# Altium PCB Key.PcbDoc
Units mil, origin at the board's own origin, x right, y up, seen from the top; angles counter-clockwise.
Board outline 6000 x 4000 mil, 2 copper layers (Top Layer, Bottom Layer); 8 components, 4 nets, 18 pads, 2 vias.
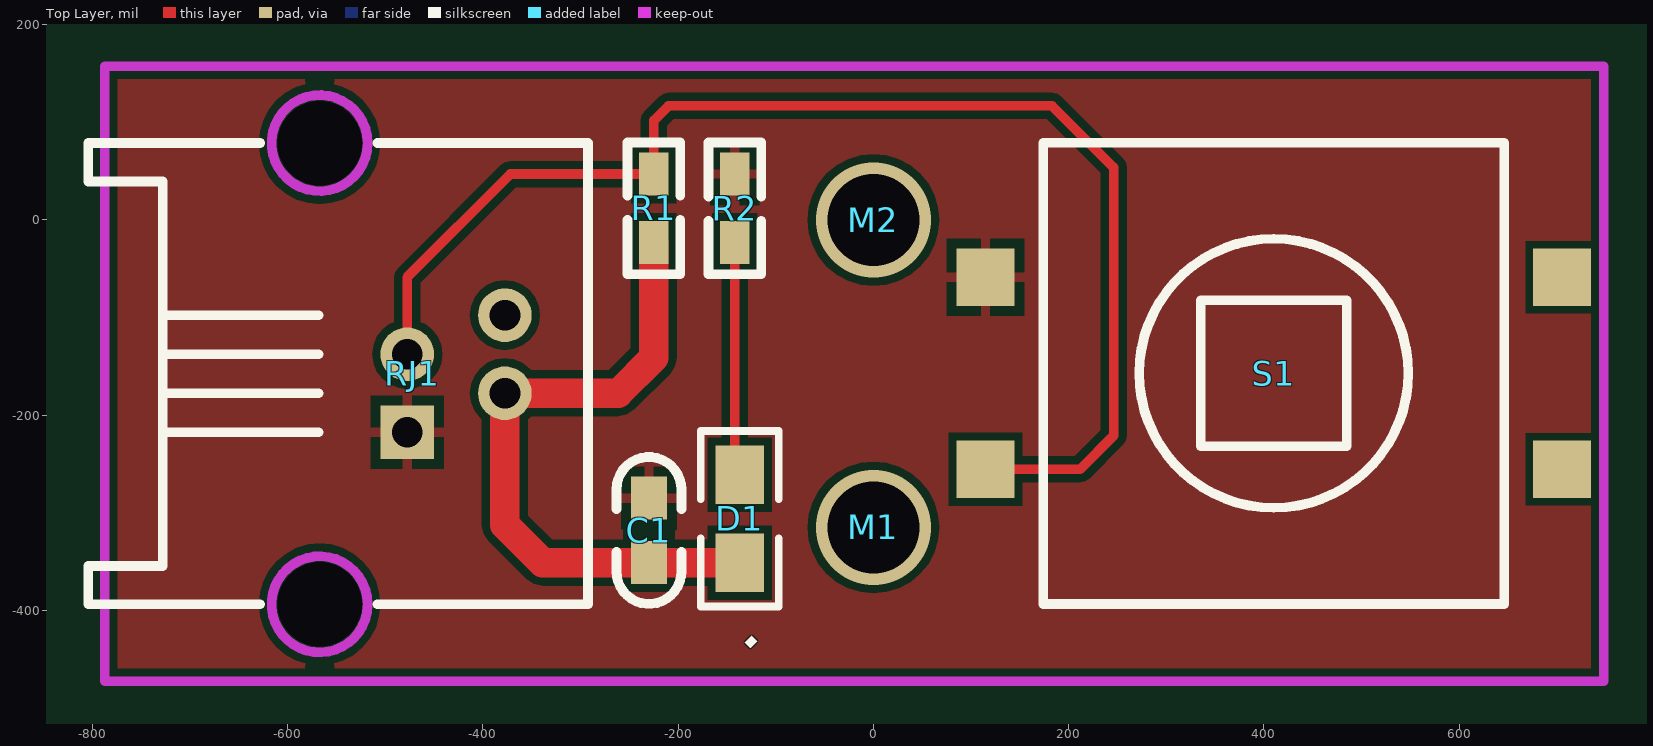
[diagram p0: Top Layer view]
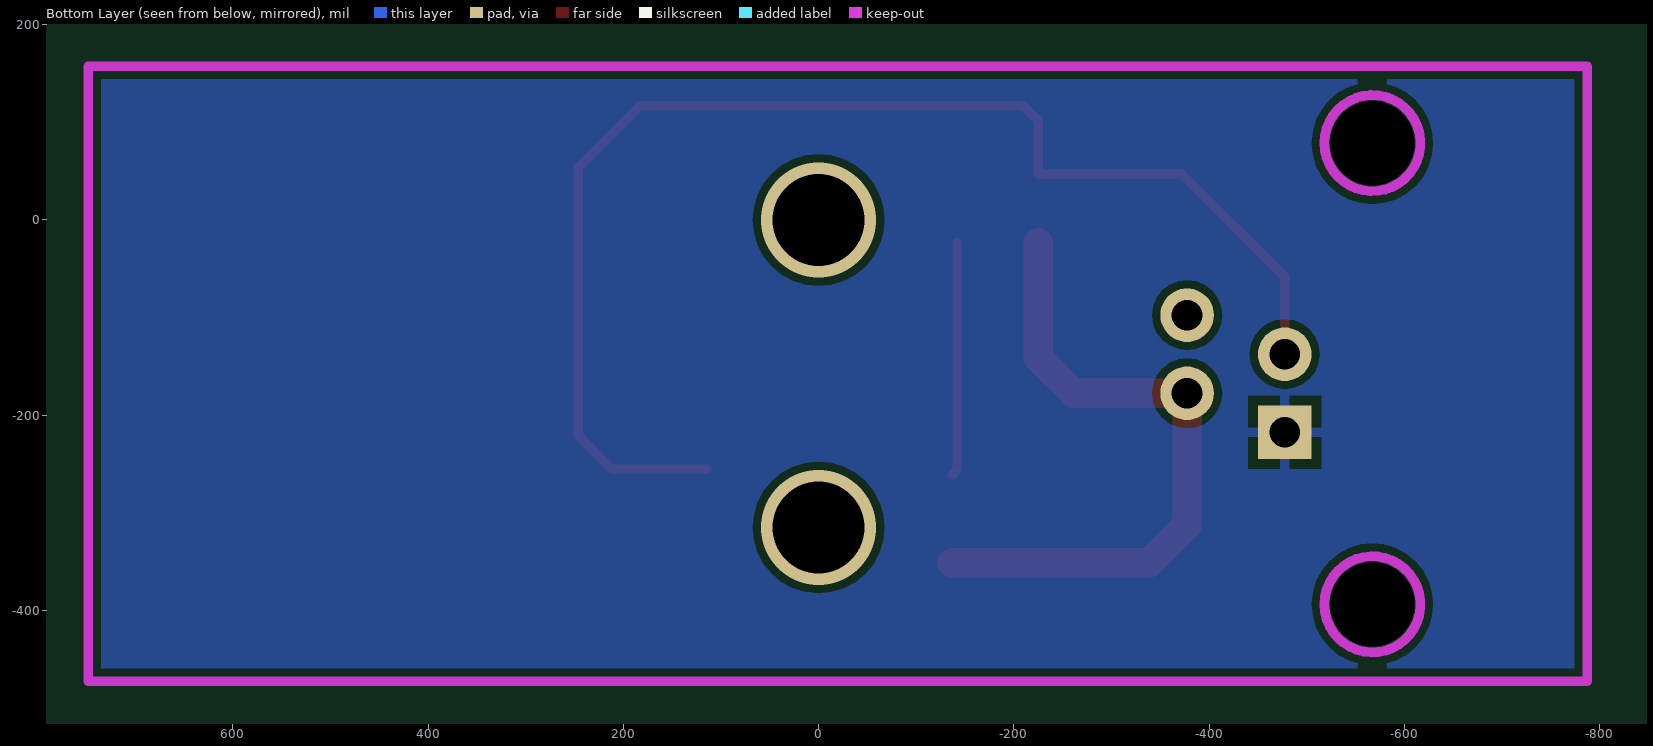
[diagram p1: Bottom Layer view, seen from below]

## Layer stack, top to bottom
Top Solder: solder mask 0.4, Solder Resist, Dk 3.5
Top Layer: signal copper 1.4
Dielectric 1: dielectric 12.6, FR-4, Dk 4.8
Bottom Layer: signal copper 1.4
Bottom Solder: solder mask 0.4, Solder Resist, Dk 3.5

## Board outline
-3770,-2470 2230,-2470 2230,1530 -3770,1530

## Design rules (kind name [scope] priority, off if disabled: settings)
Clearance [All] p1: gap=8
PolygonConnect [All] p1: connectstyle=Relief reliefconductorwidth=10 reliefentries=4 polygonreliefangle="90 Angle" airgapwidth=10
RoutingVias [All] p1: holewidth=28 width=50 viastyle="Through Hole" minholewidth=28 minwidth=50 maxholewidth=28 maxwidth=50
SolderMaskExpansion [All] p1: expansion=4
Width [All] p1: maxlimit=218.11 minlimit=10 preferedwidth=10
29 further rules are at their usual default settings.

## Components (designator, comment, footprint, x,y, rotation, side; value= is the part's Value field where it differs from the comment)
C1 "Cap" 0603_C -230,-318 r180 top
D1 "LED" 0805 -137,-306 r0 top
M1 "M2" M2 0,-314.96 r0 top
M2 "M2" M2 0,0 r0 top
R1 "Res2" 0603_R -225,12 r180 top
R2 "Res2" 0603_R -142,12 r0 top
RJ1 "RJ11" RJ11 -472.44,-157.48 r90 top
S1 "K1" KEY-12*12*7.3 410,-157 r0 top

## Footprints (in the part's own frame and the unit in brackets; to place one, negate y for a bottom-side part, rotate by r counter-clockwise, add the part's x,y. Pads: shape width x height; smd on the part's side, far side on the other; paste and mask are expansions set on the pad)
0603_C [mil]
  rect 37x44 smd: 1(0,-33) 2(0,33)
  silkscreen extent -33,-75 33,75
0603_R [mil]
  rect 30x44 smd: 1(0,35) 2(0,-35)
  silkscreen extent -27,-68 27,68, body extent -19,-52 20,50, height 21
0805 [mil]
  rect 50x60 smd: 1(0,-45) 2(0,45)
  silkscreen extent -40,-90 40,90
KEY-12*12*7.3 [mm]
  rect 1.5x1.5 smd: 1(-7.5,2.5) 2(-7.5,-2.5) 3(7.5,-2.5) 4(7.5,2.5)
  silkscreen extent -6,-6 6,6
M2 [mil]
RJ11 [mm]
  round 2.1 hole 2.2 unplated: 0(-6,2.41) 0(6,2.41)
  rect 1.397x1.397 hole 0.8: 1(-1.524,0.13)
  round 1.397 hole 0.8: 2(-0.508,-2.41) 3(0.508,0.13) 4(1.524,-2.41)
  Keep-Out Layer circle w0.254: c-6,2.41 r1.25
  Keep-Out Layer circle w0.254: c6,2.41 r1.25
  silkscreen extent -6,-4.57 6,8.43

## Part data
C1: "Capacitor"
D1: library part LED1, "Typical RED GaAs LED"
M1 M2: library part M3
R1 R2: "Resistor"
S1: library part SW-PB, "Switch"

## Via types
v1: diameter 118.11, hole 94.49, Top Layer to Bottom Layer, 2 vias

## Nets (pads, with @x,y where several pads share a name; then routed paths per layer and width w, separated by ;. In a path a pad name is that pad's centre, name@x,y a point inside that pad or via, vN(x,y) a via of type N, cw(c..) or ccw(c..) an arc to the next point about the centre after c; other vN are vias at no path point)
GND: C1.1 R2.1 RJ1.1 S1.1
NetD1_2: D1.2 R2.2 | length 240.1
  Top Layer w10: R2.2 -142,-256 D1.2
NetR1_2: R1.2 RJ1.3 S1.2 | length 1354
  Top Layer w10: RJ1.3 -477.56,-58.56 -372,47 R1.2 -225,102 -210,117 183,117 246,54 246,-221 211.57,-255.43 S1.2
VCC: C1.2 D1.1 R1.1 RJ1.2 | length 677.2
  Top Layer w30: R1.1 -225,-141 -261.48,-177.48 RJ1.2 -377.56,-312.44 -339,-351 C1.2 D1.1
pads on no net: RJ1.0 RJ1.4 S1.3 S1.4
copper on no net:
  other v1: 0,-314.96 0,0

## Polygon pours and split planes (outlines as drawn)
GND on Top Layer "Top Layer-No Net" (solid, remove dead copper, pour order 6): -832,199 830,199 833,202 846,189 846,-544 -802,-544 -833,-513
GND on Bottom Layer "Top Layer-No Net" (solid, remove dead copper, pour order 8): -809,191 -804,186 793,186 793,-504 773,-524 767,-518 -825,-518

## Keep-outs
Keep-Out Layer:
  lines w10: -787.4,-472.44 -787.4,157.48 748.03,157.48 748.03,-472.44 -787.4,-472.44

## Silkscreen, mask and mechanical layers (free items; w line width, h text height)
Top Overlay:
  text "." at -138,-427 h60 r315

## Text inside footprints (layer, text, board x,y; h text height)
RJ1: Mechanical 1 "1" at -568.11,-227.48 h39.37 r270; Mechanical 1 "2" at -348.11,-187.48 h39.37 r270; Mechanical 1 "3" at -568.11,-147.48 h39.37 r270; Mechanical 1 "4" at -348.11,-107.48 h39.37 r270; Mechanical 1 "1" at -748.11,-237.48 h39.37 r270; Mechanical 1 "4" at -748.11,-97.48 h39.37 r270